# EAGLE board mp3player_v6_Laderegler_LTC4063 (EAGLE 9.2.0)
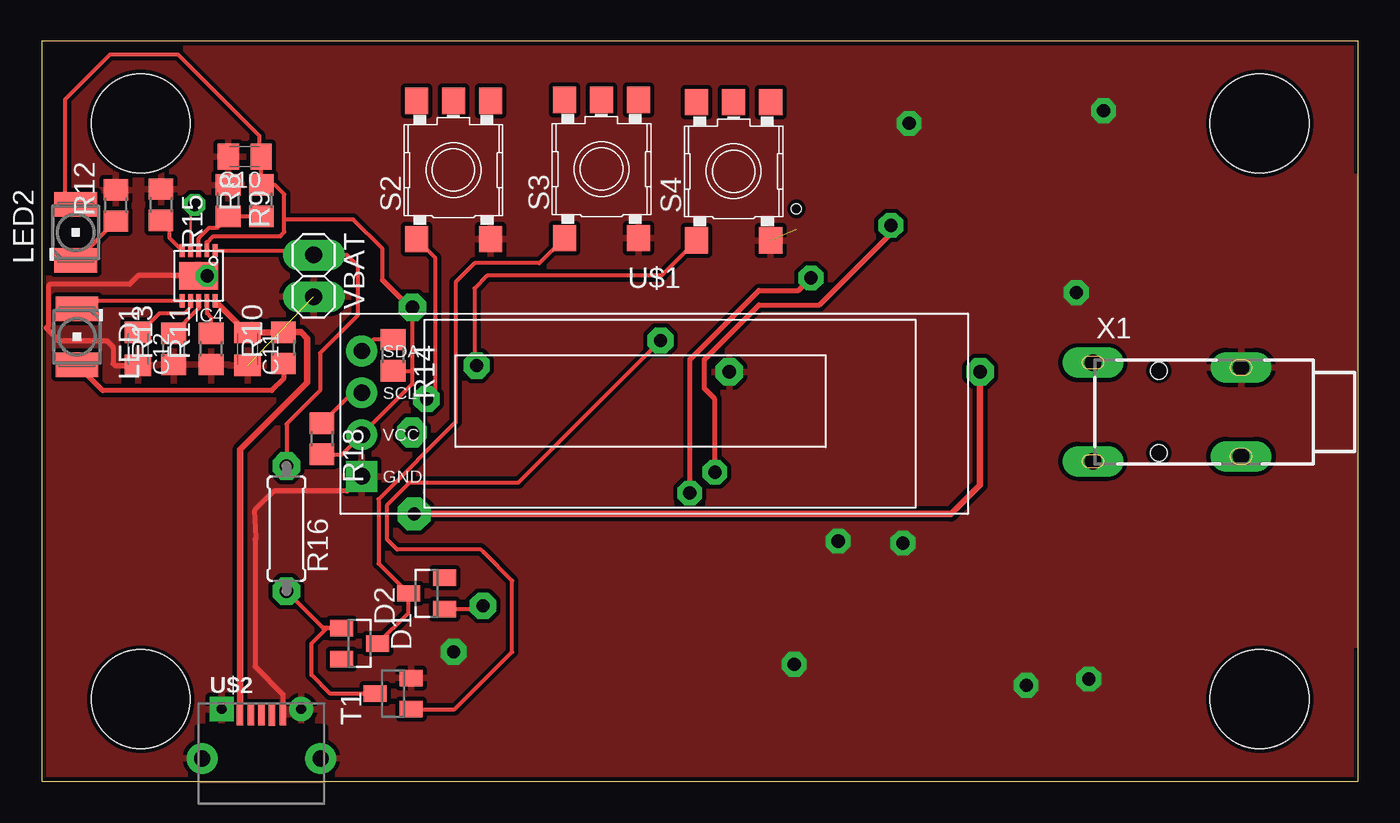
[diagram p0: board, top side]
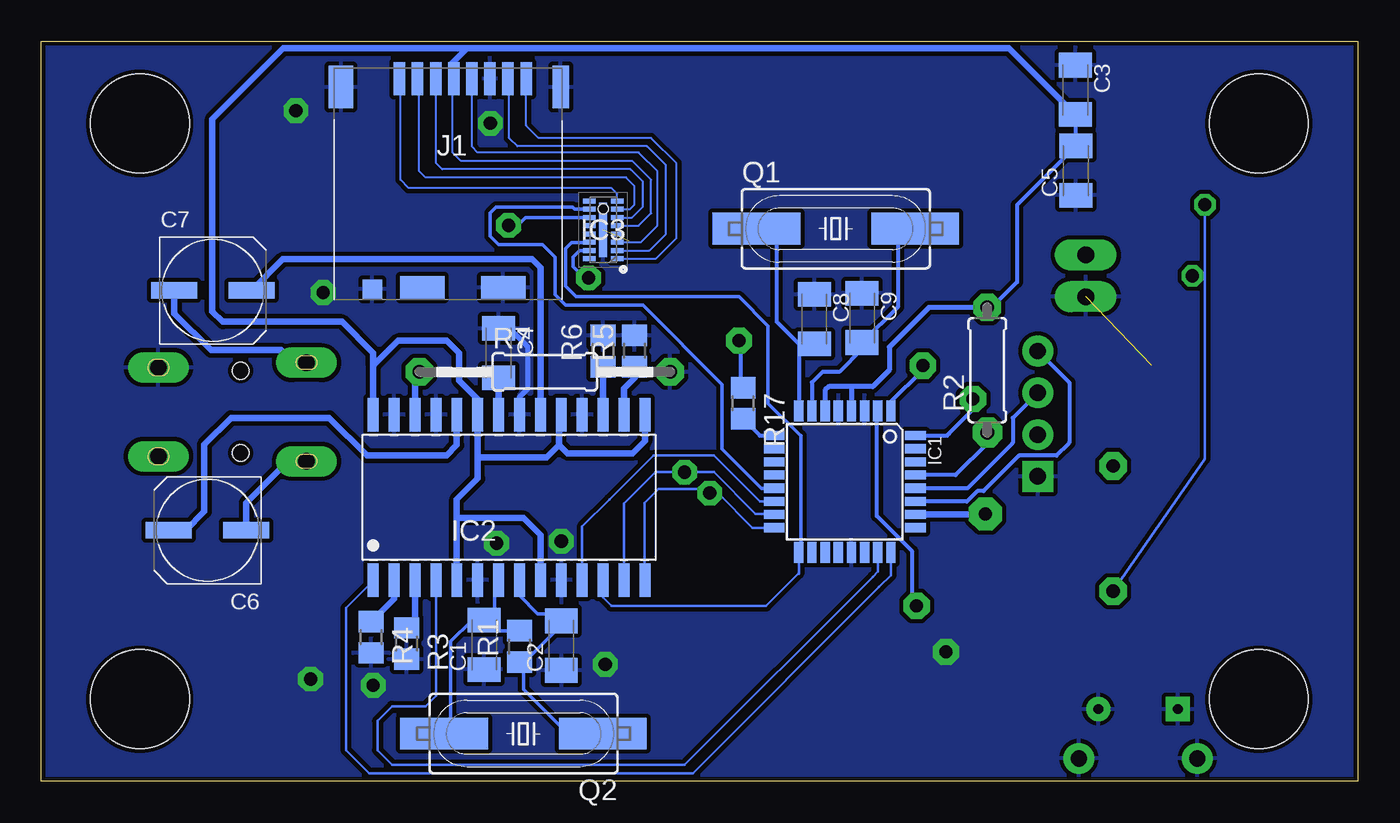
[diagram p1: board, bottom side, seen from below]

Size 80 x 45 mm. Coordinates in mm from the lower left corner, seen from the top.
Outline: 0,0 80,0 80,45 0,45 0,0
Copper layers (1*16): Top 0.035mm / dielectric 1.5mm / Bottom 0.035mm
Design rules "default *": minimum track width 5mil, minimum drill 24mil, track to track 5mil, track to pad 5mil, pad to pad 5mil, via to via 5mil, smd to smd 5mil, copper to edge 2mil, drill to drill 8mil, minimum pad ring 17mil, minimum via ring 8mil, stop-mask expansion 4mil, vias tented up to drill 0mil, thermal gap 10mil
Holes 6 mm at 6,40 74,40 74,5 6,5
Holes 0.6 mm at 45.85,34.8

## Footprints (pad centres in the part's own frame; a part is rotated, then mirrored left to right if it is on the bottom)
C1206K = smd 1.5 x 2: 1 -1.5,0; 2 1.5,0
UD-6,3X7,7_NICHICON = smd 2.8 x 1: + 2.35,0; - -2.35,0
C0805K = smd 1.3 x 1.6: 1 -1,0; 2 1,0
SOT23 = smd 1 x 1.4: 1 -0.95,-1.1; 2 0.95,-1.1; 3 0,1.1
TQFP32-08 = smd 1.27 x 0.559: 1 -4.293,2.8; 2 -4.293,2; 3 -4.293,1.2; 4 -4.293,0.4; 5 -4.293,-0.4; 6 -4.293,-1.2; 7 -4.293,-2; 8 -4.293,-2.8; 17 4.293,-2.8; 18 4.293,-2; 19 4.293,-1.2; 20 4.293,-0.4; 21 4.293,0.4; 22 4.293,1.2; 23 4.293,2; 24 4.293,2.8 | smd 0.559 x 1.27: 9 -2.8,-4.293; 10 -2,-4.293; 11 -1.2,-4.293; 12 -0.4,-4.293; 13 0.4,-4.293; 14 1.2,-4.293; 15 2,-4.293; 16 2.8,-4.293; 25 2.8,4.293; 26 2,4.293; 27 1.2,4.293; 28 0.4,4.293; 29 -0.4,4.293; 30 -1.2,4.293; 31 -2,4.293; 32 -2.8,4.293
SOIC-28 = smd 0.66 x 2.032: 1 -6.985,-5.029; 2 -5.715,-5.029; 3 -4.445,-5.029; 4 -3.175,-5.029; 5 -1.905,-5.029; 6 -0.635,-5.029; 7 0.635,-5.029; 8 1.905,-5.029; 9 3.175,-5.029; 10 4.445,-5.029; 11 5.715,-5.029; 12 6.985,-5.029; 13 8.255,-5.029; 14 9.525,-5.029; 15 9.525,5.029; 16 8.255,5.029; 17 6.985,5.029; 18 5.715,5.029; 19 4.445,5.029; 20 3.175,5.029; 21 1.905,5.029; 22 0.635,5.029; 23 -0.635,5.029; 24 -1.905,5.029; 25 -3.175,5.029; 26 -4.445,5.029; 27 -5.715,5.029; 28 -6.985,5.029
SON50P160X400X65-17N = smd 0.75 x 0.3: 1 -0.85,1.75; 2 -0.85,1.25; 3 -0.85,0.75; 4 -0.85,0.25; 5 -0.85,-0.25; 6 -0.85,-0.75; 7 -0.85,-1.25; 8 -0.85,-1.75; 9 0.85,-1.75; 10 0.85,-1.25; 11 0.85,-0.75; 12 0.85,-0.25; 13 0.85,0.25; 14 0.85,0.75; 15 0.85,1.25; 16 0.85,1.75 | smd 0.5 x 3.3: 17 0,0
LTC4063 = smd 0.3 x 0.8: P1 -1,-1.525; P2 -0.5,-1.525; P3 0,-1.525; P4 0.5,-1.525; P5 1,-1.525; P6 1,1.525; P7 0.5,1.525; P8 0,1.525; P9 -0.5,1.525; P10 -1,1.525 | smd 2.38 x 1.65: P11 0,0
DM3CS-SF = smd 0.7 x 2: 1 0,0; 2 -1.1,0; 3 -2.2,0; 4 -3.3,0; 5 -4.4,0; 6 -5.5,0; 7 -6.6,0; 8 -7.7,0 | smd 1 x 2.6: 9 -9.8,0.5 | smd 1.5 x 2.6: 10 3.55,0.5 | smd 1.2 x 1.2: 11 1.65,12.8 | smd 2.7 x 1.4: 12 -1.4,12.7; 13 -6.3,12.7
PLCC2 = smd 2.6 x 1.5: A 0,1.7; C 0,-1.7
HC49UP = smd 5.334 x 1.93: 1 -4.826,0; 2 4.826,0
R0805 = smd 1.3 x 1.5: 1 -0.95,0; 2 0.95,0
0207/7 = drill 0.813 octagon: 1 -3.81,0; 2 3.81,0
0207/15 = drill 0.813 octagon: 1 -7.62,0; 2 7.62,0
SKHMPXE010 = smd 1.6 x 1.4: 1 -4.2,2.25; 2 4.2,2.25; 3 -4.2,-2.25; 4 4.2,-2.25; 5 4.2,0
DISPLAY-OLED-128X32 = drill 1 square: 1 -17.78,-3.81 | drill 1: 2 -17.78,-1.27; 3 -17.78,1.27; 4 -17.78,3.81
ZX62D-B-5P8 = smd 0.4 x 1.35: P$1 -1.3,2.675; P$2 -0.65,2.675; P$3 0,2.675; P$4 0.65,2.675; P$5 1.3,2.675 | drill 0.6 pad 1 square: SH1 -2.425,3 | drill 0.6 pad 1: SH2 2.425,3 | drill 1 pad 1.4: SH3 -3.6,0; SH4 3.6,0
1X02 = drill 1.016 long: 1 -1.27,0; 2 1.27,0
1503_07 = drill 1 pad 1.2 long: 1 -3,-11; 2@1 -2.7,-2; 2@2 2.7,-2; 3 3,-11 | hole 1: -2.5,-7; 2.5,-7

## Placement (x,y rotation side)
C1  33p  [C1206K]  53.07,8.3 90 bottom
C2  33p  [C1206K]  48.39,8.26 90 bottom
C3  100n  [C1206K]  17.14,42.04 270 bottom
C4  100n  [C1206K]  52.2,26.04 270 bottom
C5  100n  [C1206K]  17.12,37.12 90 bottom
C6  100µ/16V  [UD-6,3X7,7_NICHICON]  69.89,15.27 180 bottom
C7  100µ/16V  [UD-6,3X7,7_NICHICON]  69.56,29.85 0 bottom
C8  22p  [C1206K]  33.01,28.1 270 bottom
C9  22p  [C1206K]  30.11,28.17 270 bottom
C10  2.2u  [C0805K]  12.32,37.97 180 top
C11  1u  [C0805K]  12.49,26.29 270 top
C12  0u1  [C0805K]  5.84,26.29 270 top
D1  BAT54  [SOT23]  19.3,8.38 270 top
D2  BAT54  [SOT23]  23.37,11.43 90 top
IC1  MEGA8-168  [TQFP32-08]  31.16,18.22 270 bottom
IC2  VS1011  [SOIC-28]  52.83,17.27 0 bottom
IC3  [SON50P160X400X65-17N]  45.85,33.53 180 bottom
IC4  LTC4063  [LTC4063]  9.52,30.73 180 top
J1  [DM3CS-SF]  58.23,42.71 180 bottom
LED1  [PLCC2]  2.13,27.02 180 top
LED2  [PLCC2]  2.05,33.37 0 top
Q1  20MHz  [HC49UP]  31.71,33.6 0 bottom
Q2  12MHz  [HC49UP]  50.69,2.91 180 bottom
R1  1M  [R0805]  50.93,8.21 90 bottom
R2  10k  [0207/7]  22.5,25 90 bottom
R3  100k  [R0805]  57.78,8.38 270 bottom
R4  100k  [R0805]  59.94,8.76 270 bottom
R5  100k  [R0805]  43.94,26.16 90 bottom
R6  100k  [R0805]  45.85,26.16 90 bottom
R7  100k  [0207/15]  49.39,24.9 0 bottom
R8  440k  [R0805]  13.33,35.31 90 top
R9  160k  [R0805]  11.32,35.31 270 top
R10  330  [R0805]  14.68,26.35 90 top
R11  1K8  [R0805]  10.29,26.29 90 top
R12  150  [R0805]  4.49,35.01 90 top
R13  1K8  [R0805]  8,26.29 90 top
R14  100k  [R0805]  21.34,25.91 270 top
R15  2M  [R0805]  7.24,35.05 270 top
R16  10K  [0207/7]  14.86,15.37 270 top
R17  10K  [R0805]  37.34,22.99 270 bottom
R18  100k  [R0805]  17.02,20.83 270 top
S2  [SKHMPXE010]  25.01,37.16 90 top
S3  [SKHMPXE010]  34.01,37.23 90 top
S4  [SKHMPXE010]  42.04,37.08 90 top
T1  BC846  [SOT23]  21.34,5.33 90 top
U$1  DISPLAY-OLED-128X32  [DISPLAY-OLED-128X32]  37.21,22.35 0 top
U$2  ZX62D-B-5P8  [ZX62D-B-5P8]  13.33,1.4 0 top
VBAT  [1X02]  16.52,30.73 270 top
X1  1503_07  [1503_07]  74.87,22.46 270 top

## Library data of the parts
C1-C7 C10-C12 R11 = rcl
C8 C9 = rcl; SPICEPREFIX: C
D1 D2 = diode
IC1 = atmel; MPN: ATMEGA8-16AU; OC_FARNELL: 9171371; OC_NEWARK: 73M8863
IC2 = vs10xx
IC3 = SamacSys_Parts; ARROW_PART_NUMBER: ECLAMP2410P.TCT; ARROW_PRICE/STOCK: https://www.arrow.com/en/products/eclamp2410p.tct/semtech; DESCRIPTION: EClamp ESD-EMI Protect T-Flash/MicroSD Semtech ECLAMP2410P.TCT, Hex Bi-Directional EMI Filter & ESD Protector, 16-Pin SLP EP; HEIGHT: 0.65mm; MANUFACTURER_NAME: SEMTECH; MANUFACTURER_PART_NUMBER: ECLAMP2410P.TCT; RS_PART_NUMBER: 6910638; RS_PRICE/STOCK: http://uk.rs-online.com/web/p/products/6910638
IC4 = LinearTechnology
J1 = SamacSys_Parts; ARROW_PART_NUMBER: DM3CS-SF; ARROW_PRICE/STOCK: https://www.arrow.com/en/products/dm3cs-sf/hirose-electric; DESCRIPTION: MicroSD card connector, push-pull type MicroSD card connector, push-pull type; HEIGHT: mm; MANUFACTURER_NAME: Hirose; MANUFACTURER_PART_NUMBER: DM3CS-SF; RS_PART_NUMBER: 1664833; RS_PRICE/STOCK: http://uk.rs-online.com/web/p/products/1664833
LED1 LED2 = led; COLOR: green
Q1 = crystal; OC_FARNELL: unknown; OC_NEWARK: unknown
Q2 = crystal
R1-R10 R12-R18 = rcl; SPICEPREFIX: R
S2-S4 = switch
T1 = transistor-neu-to92
U$1 = diy-modules
U$2 = j_usb_hirose_zx62d-b-5p8
VBAT = pinhead
X1 = con-lumberg; OC_FARNELL: unknown; OC_NEWARK: unknown

## Nets
!CH: IC4.P5 R15.2
!LD: D1.1 IC4.P4 R16.2 T1.3
+3V3: C3.2 C5.2 C10.1 IC1.4 IC1.6 IC2.5 IC2.9 IC2.15 IC2.19 IC2.23 IC2.28 IC3.5 IC4.P2 J1.4 LED2.A R2.2 R8.2 R14.2 R18.2 U$1.2
+5V: C11.1 IC4.P10 R10.2 U$2.P$1
AVCC: IC1.18
GND: C1.1 C2.1 C3.1 C4.1 C5.1 C8.1 C9.1 C10.2 C11.2 C12.2 IC1.3 IC1.5 IC1.21 IC2.6 IC2.10 IC2.18 IC2.21 IC2.25 IC2.27 IC3.17 IC4.P11 J1.6 J1.9 J1.10 J1.11 J1.13 R3.2 R4.2 R5.2 R6.2 R7.2 R9.1 R11.1 R12.2 R13.1 R15.1 S2.3 S3.3 S4.3 T1.2 U$1.1 U$2.P$5 U$2.SH1 U$2.SH2 U$2.SH3 U$2.SH4 VBAT.2 X1.2@1
N$1: IC1.17 IC2.12 IC3.14
N$2: IC1.16 IC2.14 IC3.15
N$3: IC1.15 IC2.13 IC3.11
N$4: IC1.14 IC2.11
N$6: C2.2 IC2.8 Q2.1 R1.1
N$7: IC1.23 IC2.4
N$8: C4.2 IC2.22
N$9: IC2.3 R3.1
N$10: C1.2 IC2.7 Q2.2 R1.2
N$11: IC2.2 R4.1
N$12: IC1.32 S2.1
N$13: IC2.17 R6.1
N$14: IC2.16 R5.1
N$15: IC1.24 IC2.1
N$16: D2.1 IC1.2
N$17: IC1.26 IC2.26 R7.1
N$18: IC1.29 R2.1
N$19: C7.+ IC2.20
N$20: C6.+ IC2.24
N$21: IC1.1 S4.1
N$22: C6.- X1.3
N$23: C7.- X1.1
N$24: C8.2 IC1.8 Q1.1
N$25: C9.2 IC1.7 Q1.2
N$26: IC3.1 J1.8
N$27: IC3.8 J1.1
N$28: IC4.P3 R8.1 R9.2
N$29: IC3.7 J1.2
N$30: IC3.2 J1.7
N$31: IC3.3 J1.5
N$32: IC3.6 J1.3
N$33: IC4.P1 R16.1 VBAT.1
N$34: LED1.A R10.1
N$35: IC4.P9 R11.2
N$36: IC4.P6 LED1.C
N$37: LED2.C R12.1
N$38: IC4.P8 R13.2
N$39: C12.1 IC4.P7
N$40: IC1.27 R14.1 U$1.4
N$41: IC1.28 R18.1 U$1.3
N$43: IC1.13 IC3.10
N$47: R17.1 T1.1
N$49: IC1.9 R17.2
N$51: D1.3 D2.3 S3.1

## Tracks (layer width: path | path; a pad name or v marks a point on that pad's centre or on a via)
!CH
  Top 0.152: IC4.P5 8.51,32.26 | 7.75,33.78 7.43,34.1 R15.2
  Top 0.254: IC4.P5 7.75,33.04 7.75,33.78
!LD  (via drill 0.8 pad 1.3)
  Top 0.152: IC4.P4 9.02,34.42 9.27,34.67 v9.27,35.05
  Top 0.254: R16.2 17.08,9.33 D1.1 17.33,9.33 16.38,8.38 16.38,6.48 17.53,5.33 T1.3
  Bottom 0.152: v9.27,35.05 9.27,19.61 R16.2
+3V3
  Top 0.152: IC4.P2 | 14.04,36.26 R8.2 | 1.91,35.22 LED2.A | 13.33,37.96 C10.1
  Top 0.254: 10.02,32.76 10.41,33.15 14.48,33.15 14.73,33.4 14.73,34.16 | 14.73,34.16 14.73,35.69 14.16,36.26 R8.2 13.33,37.96 | 13.21,38.08 13.21,39.24 8.26,44.19 4.15,44.19 1.43,41.47 1.43,35.7 LED2.A | 22.5,24.89 R2.2 22.37,28.81 | 22.5,24.89 22.5,24.15 U$1.2 18.23,19.88 R18.2 | 20.7,30.48 20.7,32.38 18.92,34.16 14.73,34.16 | R14.2 22.43,24.96 22.5,24.89
  Top 0.305: IC4.P2 10.02,32.76 | 22.37,28.81 20.7,30.48
  Top 1.016: 13.21,38.08 13.33,37.96
  Bottom 0.127: IC3.5 43.69,33.78 42.93,34.54 42.93,36.58 44.07,37.72 54.48,37.72 54.99,38.23 54.99,42.65 J1.4
  Bottom 0.152: 54.99,43.69 54.99,42.65
  Bottom 0.254: R2.2 22.24,28.81 20.7,30.35 20.7,35.04 C5.2 17.14,38.65 C3.2 | 30.73,24 30.76,23.98
  Bottom 0.305: R2.2 26.05,28.81 28.45,26.42 28.45,25.02 29.46,24 30.73,24 32.13,24 32.36,23.78 IC1.6 | 30.76,23.98 IC1.4
  Bottom 0.406: IC2.5 54.74,16 | 54.74,16 54.74,17.14 53.47,18.41 53.47,19.68 | 53.47,19.68 IC2.23 53.47,23.24 54.61,24.38 54.61,26.04 55.37,26.8 58.29,26.8 59.82,25.27 | 53.47,19.68 49.28,19.68 48.51,20.45 | 48.51,20.45 48.51,22.17 IC2.19 | IC2.15 43.31,20.7 44.07,19.94 48.01,19.94 48.51,20.45 | IC2.9 49.66,14.99 50.67,16 54.74,16 | C3.2 21.19,44.58 54.1,44.58 | 54.1,44.58 54.99,43.69 | 59.82,25.27 IC2.28 | 59.82,25.27 59.82,26.04 61.72,27.94 68.96,27.94 69.6,28.57 69.6,40.26 65.28,44.58 54.1,44.58
+5V
  Top 0.152: 12.45,27.29 C11.1 | 14.66,27.29 R10.2
  Top 0.406: IC4.P10 12.45,27.29 | C11.1 14.66,27.29 | R10.2 15.75,27.3 16.13,26.92 16.13,24.26 12.04,20.16 U$2.P$1
GND  (via drill 0.8 pad 1.5, 0.8 pad 1.6)  (2 unrouted)
  Top 0.152: 4.54,36 R12.2
  Top 0.305: U$2.P$5 14.63,5.3 12.95,6.99 12.95,14.73 13.01,14.79 12.94,16.49 14.1,17.65 18.54,17.65 U$1.1 | IC4.P11 5.84,30.73 5.33,30.23 0.51,30.23 0.38,30.1 0.38,27.69 0.25,27.56 1.02,26.8 3.94,26.8 4.32,26.42 4.32,25.4 4.43,25.29 C12.2
  Bottom 0.305: IC2.21 50.93,23.37 50.42,23.88 50.42,26.42 51.54,27.54 C4.1
  other vias: 45.72,7.11 59.82,5.84 63.63,6.22 62.86,29.72 64.52,40.77 52.7,40.01 52.32,14.48 48.39,14.61 25.02,7.87
  pour Bottom (isolate 0.254): 0,45 0,-0.16 80,-0.16 80,45
  pour Top (isolate 0.254): 0,0 80.01,0 80.01,44.83 -0.13,44.83 -0.13,0
  pour Top: 76.07,36.96 80.01,36.96 80.01,8.13 76.07,8.13
N$1
  Bottom 0.152: IC2.12 45.85,11.18 45.34,10.67 35.94,10.67 33.97,12.64 33.96,12.62 IC1.17
  Bottom 0.203: IC1.17 33.83,14.05 33.83,21.04 33.84,21.02 35.81,22.99 35.81,27.69 37.59,29.46 47.5,29.46 48.13,30.1 48.13,32.38 47.75,32.77 46.71,32.77 IC3.14
N$2  (via drill 0.8 pad 1.5)
  Top 0.305: v39.37,17.53 39.37,25.65 43.56,29.84 45.97,29.84 v46.74,30.61
  Bottom 0.152: IC2.14 43.33,12.26 43.33,16.94 42.49,17.78 39.88,17.78 | IC1.16 36.76,15.42 38.86,17.53 v39.37,17.53
  Bottom 0.203: v39.37,17.53 39.62,17.53 39.88,17.78 | v46.74,30.61 46.99,30.86 47.24,30.86 47.68,31.29 47.68,31.88 47.27,32.28 IC3.15
N$3  (via drill 0.8 pad 1.5)
  Top 0.203: 51.69,33.78 51.61,33.78 v51.59,33.8
  Top 0.305: v40.89,18.8 40.89,23.24 40.26,23.88 40.26,25.65 43.56,28.96 47.24,28.96 51.69,33.4 51.69,33.78
  Bottom 0.152: 44.45,12.37 IC2.13 44.58,16.89 42.67,18.8 41.54,18.8 | v40.89,18.8 39.12,18.8 36.58,16.26 35.48,16.26 IC1.15
  Bottom 0.203: 41.54,18.8 v40.89,18.8 | v51.59,33.8 51.04,33.8 50.56,34.28 IC3.11
N$4
  Bottom 0.152: IC1.14 36.32,17.02 39.12,19.81 42.8,19.81 45.47,17.14 47.12,15.49 IC2.11
N$5  (via drill 0.35)
  other vias: 5.97,40.01
N$6
  Bottom 0.203: Q2.1 47.99,2.9 50.67,5.59 50.67,7 R1.1 50.63,7.26 48.39,9.5 C2.2 48.39,9.91 48.68,10.2 49.82,10.2 50.93,11.3 IC2.8
N$7
  Bottom 0.152: IC2.4 56.01,5.21 56.64,4.57 58.67,4.57 59.56,3.68 59.56,1.91 58.67,1.02 40.89,1.02 29.46,12.45 29.16,12.75 IC1.23
N$8
  Bottom 0.406: C4.2 IC2.22
N$9
  Bottom 0.406: IC2.3 57.28,9.84 R3.1
N$10
  Bottom 0.152: 52.96,9.91 C1.2
  Bottom 0.203: R1.2 52.2,9.16 52.96,9.91 | IC2.7 52.45,11.99 52.45,10.04 52.69,9.8 C1.2 53.82,9.8 55.12,8.51 55.12,3.3 Q2.2
N$11
  Bottom 0.406: IC2.2 58.55,11.11 R4.1
N$12  (via drill 0.8 pad 1.6)
  Top 0.254: S2.1 23.88,31.84 23.88,23.75 v23.37,23.24
  Bottom 0.254: v23.37,23.24 23.37,22.61 24.83,21.14 24.89,21.08 24.95,21.02 IC1.32
N$13
  Bottom 0.406: R6.1 IC2.17
N$14
  Bottom 0.406: R5.1 43.94,24.51 44.58,23.88 IC2.16
N$15
  Bottom 0.152: IC1.24 28.36,12.54 29.08,11.81 40.39,0.51 60.07,0.51 61.47,1.91 61.47,10.54 59.82,12.19 IC2.1
N$16  (via drill 0.8 pad 1.6)
  Top 0.254: D2.1 26.61,10.48 v26.8,10.67
  Bottom 0.254: 26.86,10.73 v26.8,10.67 27.05,10.92 27.05,13.97 29.21,16.13 29.21,22.46 IC1.2
N$17  (via drill 0.8 pad 2)
  Top 0.406: R7.1 57.01,18.02 55.24,16.26 v22.61,16.26
  Bottom 0.406: R7.1 57.28,24.59 IC2.26 | v22.61,16.26 22.64,16.22 IC1.26
N$18
  Bottom 0.254: R2.1 22.5,20.55 24.43,18.62 IC1.29
N$19
  Bottom 0.406: IC2.20 49.66,31.24 50.16,31.75 65.31,31.75 C7.+
N$20
  Bottom 0.406: IC2.24 54.74,20.45 55.37,19.81 60.2,19.81 62.48,22.1 68.45,22.1 70.08,20.47 70.08,16.41 71.22,15.27 C6.+
N$21  (via drill 0.8 pad 1.6)
  Top 0.254: S4.1 37.64,30.73 27.05,30.73 26.29,29.97 26.29,25.65 26.42,25.53 v26.42,25.27
  Bottom 0.254: v26.42,25.27 26.42,25.02 28.36,23.08 IC1.1
N$22
  Bottom 0.406: C6.- 67.54,16.94 65.02,19.46 X1.3
N$23
  Bottom 0.406: C7.- 71.91,28.45 69.68,26.22 65.4,26.22 64.77,25.59 64,25.59 X1.1
N$24
  Bottom 0.152: 33.97,26.6 C8.2
  Bottom 0.254: C8.2 33.96,26.6 IC1.8 | Q1.1 35.9,33.6 35.31,33.01 35.31,27.94 33.97,26.6
N$25
  Bottom 0.152: 27.94,32.92 27.26,33.6 Q1.2
  Bottom 0.254: IC1.7 33.16,24.25 32.51,24.89 31.5,24.89 30.11,26.28 C9.2 27.94,28.84 27.94,32.92
N$26
  Bottom 0.127: IC3.1 42.64,31.78 41.4,33.02 41.4,37.59 42.93,39.12 49.78,39.12 50.55,39.88 50.53,39.9 J1.8
N$27
  Bottom 0.127: IC3.8 45,35.73 45.34,36.07 57.66,36.07 58.17,36.58 58.17,42.65 J1.1
N$28
  Top 0.152: IC4.P3 9.52,32.56 | R8.1 | 11.32,34.3 R9.2
  Top 0.254: R9.2 R8.1 | IC4.P3 9.52,33.02 10.16,33.66 10.67,33.66 11.32,34.3
N$29
  Bottom 0.127: IC3.7 44.22,34.78 43.94,35.05 43.94,36.2 44.45,36.7 56.64,36.7 57.02,37.08 57.02,42.61 J1.2
N$30
  Bottom 0.127: IC3.2 43.03,32.28 42.04,33.27 42.04,37.47 43.18,38.61 51.05,38.61 51.56,39.12 51.56,42.65 J1.7
N$31
  Bottom 0.127: IC3.3 43.55,32.78 42.54,33.78 42.54,37.08 43.69,38.23 53.47,38.23 53.83,38.59 J1.5
N$32
  Bottom 0.127: IC3.6 44.08,34.28 43.43,34.92 43.43,36.45 44.2,37.21 55.63,37.21 56.01,37.59 56.01,42.7 J1.3
N$33
  Top 0.152: VBAT.1
  Top 0.254: IC4.P1 16.26,32.26 VBAT.1 | VBAT.1 18.54,32 19.18,31.37 19.18,28.32 16.89,26.04 16.89,23.75 14.86,21.72 R16.1
N$34
  Top 0.305: R10.1 14.68,24.46 13.97,23.75 3.7,23.75 LED1.A
N$35
  Top 0.254: R11.2 10.29,28.19 10.02,28.46 IC4.P9
N$36
  Top 0.152: 2.61,29.21 LED1.C
  Top 0.254: IC4.P6 2.61,29.21
N$37
  Top 0.152: LED2.C 2.11,31.67
  Top 0.254: 2.11,31.67 R12.1
N$38
  Top 0.152: 9.52,28.76 IC4.P8
  Top 0.254: R13.2 9.52,28.76
N$39
  Top 0.152: 9.02,28.84 IC4.P7 | C12.1 5.97,27.29
  Top 0.203: 8.64,28.45 9.02,28.84
  Top 0.254: 5.97,27.29 7.13,28.45 8.64,28.45
N$40
  Top 0.254: R14.1 20.13,26.86 U$1.4
  Bottom 0.254: IC1.27 23.75,17.02 23.11,17.65 22.73,17.65 20.57,19.81 18.29,19.81 17.53,20.57 17.53,24.26 U$1.4
N$41
  Top 0.254: R18.1 18.86,23.62 U$1.3
  Bottom 0.254: U$1.3 20.96,22.1 20.96,20.57 23.71,17.82 IC1.28
N$42  (via drill 0.8 pad 1.8)
  other vias: 22.48,21.21
N$43
  Bottom 0.2: 36.24,17.82 38.61,20.19 38.61,24.13 43.43,28.96 48.13,28.96 48.77,29.59 48.77,31.88 49.53,32.64 52.2,32.64
  Bottom 0.203: IC1.13 36.24,17.82 | 52.2,32.64 52.7,33.15 52.7,34.54 52.34,34.91 47.71,34.91 47.59,34.78 IC3.10
N$44  (via drill 0.35)
  other vias: 74,40.01
N$45  (via drill 0.35)
  other vias: 74,5
N$46  (via drill 0.35)
  other vias: 5.98,4.99
N$47  (via drill 0.8 pad 1.6)
  Top 0.254: T1.1 25.09,4.38 28.58,7.87 28.58,12.19 26.86,13.91 26.67,14.1 21.59,14.1 20.96,14.73 20.96,16.76 22.35,18.16 28.96,18.16 v37.59,26.8
  Bottom 0.254: R17.1 37.46,24.06 37.46,26.8 v37.59,26.8
N$48  (via drill 0.8 pad 1.3)
  other vias: 10.03,30.73
N$49
  Bottom 0.254: R17.2 36.32,21.02 IC1.9
N$51
  Top 0.254: S3.1 30.23,31.5 26.29,31.5 25.15,30.35 25.15,21.84 20.45,17.14 20.45,13.25 D2.3 22.27,10.25 D1.3

## Text on the board
tNames: HTL-Saalfelden | MP3-Player
tRestrict: MP3 HTL Saalfelden
bRestrict: MP3 HTL Saalfelden